# Altium PCB JacdacSingleRgbLed 42.PcbDoc
Units mm, origin at the board's own origin, x right, y up, seen from the top; angles counter-clockwise.
Board outline 13.98 x 25.7 mm, 2 copper layers (Top Layer, Bottom Layer), stack 1.525 mm thick; 26 components, 10 nets, 77 pads, 11 vias.
Unrouted connection lines stored in the file: 16.
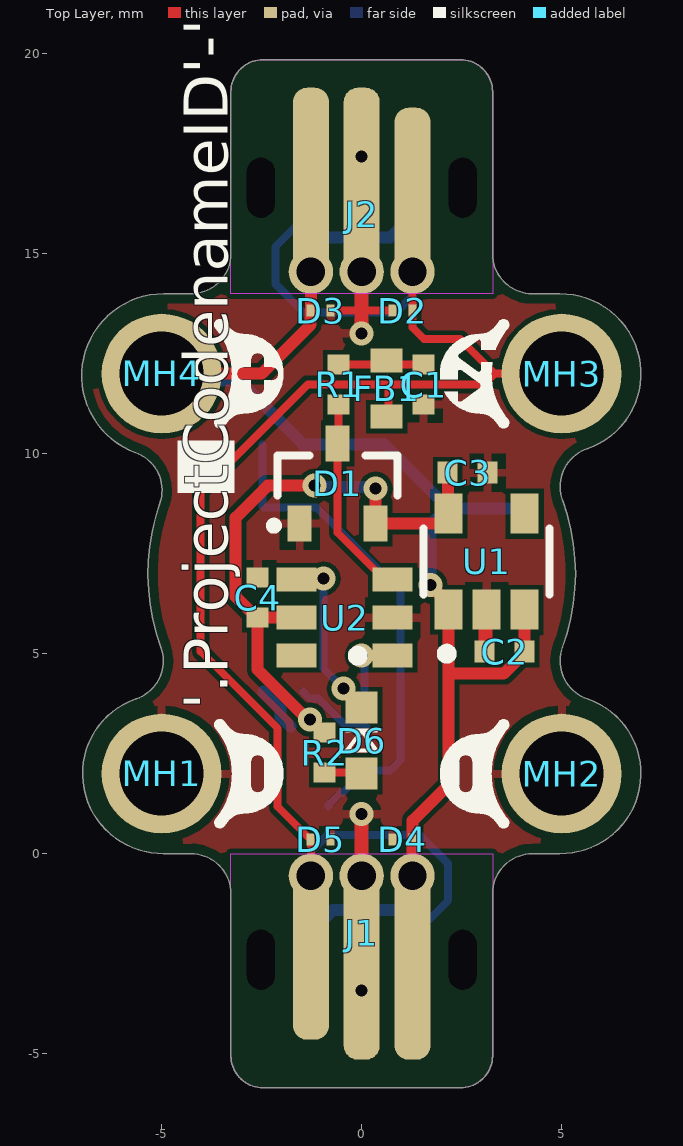
[diagram p0: Top Layer view]
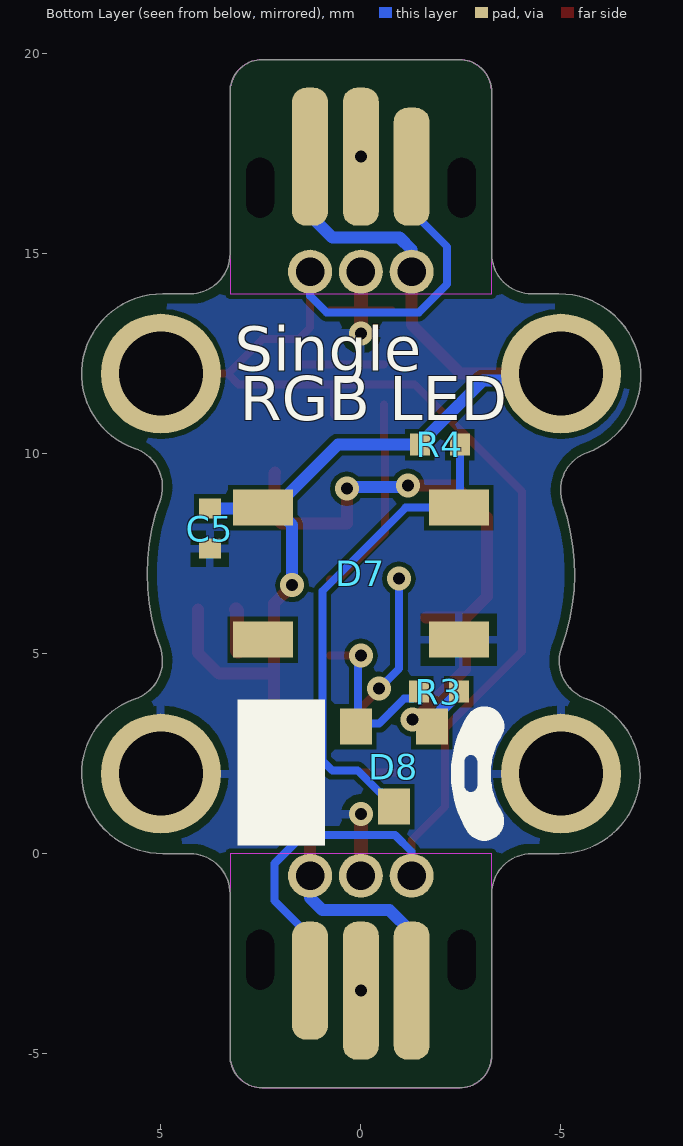
[diagram p1: Bottom Layer view, seen from below]

## Layer stack, top to bottom
Top Solder: solder mask 0.0102, Solder Resist, Dk 3.5
Top Layer: signal copper 0.0356
Dielectric 1: core 1.454, FR-4, Dk 4.2
Bottom Layer: signal copper 0.0356
Bottom Solder: solder mask 0.0102, Solder Resist, Dk 3.5

## Board outline
-4.95,0 -4.27,0 cw(c-4.27,-1) -3.27,-1 -3.27,-5.05 ccw(c-2.471,-5.051) -2.47,-5.85 2.47,-5.85 ccw(c2.471,-5.051) 3.27,-5.05 3.27,-1 cw(c4.27,-1) 4.27,0 4.95,0 ccw(c4.951,2.049) 6.4,0.6 ccw(c5,2) 5.637,3.875 cw(c5.959,4.821) 5.02,5.165 ccw(c0,7) 5.02,8.835 cw(c5.959,9.178) 5.637,10.125 ccw(c5,12) 6.586,13.186 ccw(c4.951,11.951) 4.95,14 4.27,14 cw(c4.27,15) 3.27,15 3.27,19.05 ccw(c2.471,19.051) 2.47,19.85 -2.47,19.85 ccw(c-2.471,19.051) -3.27,19.05 -3.27,15 cw(c-4.27,15) -4.27,14 -4.95,14 ccw(c-4.951,11.951) -5.651,10.026 cw(c-5.992,9.086) -5.047,8.757 ccw(c0,7) -5.02,5.165 cw(c-5.959,4.821) -5.637,3.875 ccw(c-5,2) -6.4,0.6 ccw(c-4.951,2.049)

## Design rules (kind name [scope] priority, off if disabled: settings)
AssemblyTestPointUsage [All] p1: valid=2
BoardOutlineClearance [All] p1: gap=0.3 ignorepadtopadclearanceinfootprint=FALSE except(0: Arc-SplitContinuation Track-SplitContinuation SMDPad-SplitContinuation THPad-SplitContinuation Via-SplitContinuation Fill-SplitContinuation Poly-SplitContinuation Region-OutlineEdge Region-SplitContinuation Text-OutlineEdge Text-SplitContinuation; 0.25: THPad-OutlineEdge Poly-OutlineEdge)
Clearance [All] p1: gap=0.125 ignorepadtopadclearanceinfootprint=FALSE except(0: Arc-Hole Track-Hole SMDPad-Hole THPad-Hole Via-Hole Fill-Hole Poly-Hole Region-Hole Text-Hole; 0.15: Arc-Arc Arc-Track Track-Track)
ComponentClearance SpecialComponentClearance [InComponent('MH1') or InComponent('MH2')  or InComponent('MH3')  or InComponent('MH4') vs InComponent('J3') or InComponent('J4')  or InComponent('J6')  or InComponent('J7') or InComponent('J2') or InComponent('MH2') or InComponent('J1')] p1: gap=0 collisioncheckmode=3 verticalgap=0 showdistances=FALSE
ComponentClearance [All] p2: gap=0.2 collisioncheckmode=3 verticalgap=0.2 showdistances=FALSE
DiffPairsRouting [All] p1: maxlimit=2 minlimit=0.15 mostfreqgap=0.15 toplayer_minwidth=0.15 toplayer_maxwidth=2 toplayer_prefwidth=0.15 bottomlayer_minwidth=0.15 bottomlayer_maxwidth=2 bottomlayer_prefwidth=0.15 substack1={CB9D278B-8BF5-444A-AAF4-837A2A9DF42D} toplayer_{cb9d278b-8bf5-444a-aaf4-837a2a9df42d}_minwidth=0.381 toplayer_{cb9d278b-8bf5-444a-aaf4-837a2a9df42d}_maxwidth=0.381 toplayer_{cb9d278b-8bf5-444a-aaf4-837a2a9df42d}_prefwidth=0.381 bottomlayer_{cb9d278b-8bf5-444a-aaf4-837a2a9df42d}_minwidth=0.381 bottomlayer_{cb9d278b-8bf5-444a-aaf4-837a2a9df42d}_maxwidth=0.381 bottomlayer_{cb9d278b-8bf5-444a-aaf4-837a2a9df42d}_prefwidth=0.381 substack2={826B8647-A721-4255-895A-19F9591B9CD1} toplayer_{826b8647-a721-4255-895a-19f9591b9cd1}_minwidth=0.381 toplayer_{826b8647-a721-4255-895a-19f9591b9cd1}_maxwidth=0.381 toplayer_{826b8647-a721-4255-895a-19f9591b9cd1}_prefwidth=0.381 bottomlayer_{826b8647-a721-4255-895a-19f9591b9cd1}_minwidth=0.381 bottomlayer_{826b8647-a721-4255-895a-19f9591b9cd1}_maxwidth=0.381 bottomlayer_{826b8647-a721-4255-895a-19f9591b9cd1}_prefwidth=0.381 substack3={E64FCAF4-1BC8-437D-B1E0-0E5F2DC0F59E} toplayer_{e64fcaf4-1bc8-437d-b1e0-0e5f2dc0f59e}_minwidth=0.381 toplayer_{e64fcaf4-1bc8-437d-b1e0-0e5f2dc0f59e}_maxwidth=0.381 toplayer_{e64fcaf4-1bc8-437d-b1e0-0e5f2dc0f59e}_prefwidth=0.381 bottomlayer_{e64fcaf4-1bc8-437d-b1e0-0e5f2dc0f59e}_minwidth=0.381 bottomlayer_{e64fcaf4-1bc8-437d-b1e0-0e5f2dc0f59e}_maxwidth=0.381 bottomlayer_{e64fcaf4-1bc8-437d-b1e0-0e5f2dc0f59e}_prefwidth=0.381 substack4={E61CE66C-507C-4E1E-8E83-C905434AFC1C} toplayer_{e61ce66c-507c-4e1e-8e83-c905434afc1c}_minwidth=0.381 toplayer_{e61ce66c-507c-4e1e-8e83-c905434afc1c}_maxwidth=0.381 toplayer_{e61ce66c-507c-4e1e-8e83-c905434afc1c}_prefwidth=0.381 bottomlayer_{e61ce66c-507c-4e1e-8e83-c905434afc1c}_minwidth=0.381 bottomlayer_{e61ce66c-507c-4e1e-8e83-c905434afc1c}_maxwidth=0.381 bottomlayer_{e61ce66c-507c-4e1e-8e83-c905434afc1c}_prefwidth=0.381 maxuncoupledlength=25
FabricationTestPointUsage [All] p1: valid=2 allowmultiple=FALSE
HoleSize [All] p1: absolutevalues=TRUE maxlimit=2.54 minlimit=0.2 maxpercent=80.000 minpercent=20.000
MinimumSolderMaskSliver [All] p1: minsoldermaskwidth=0.005
PlaneClearance [All] p1: clearance=0.3
PlaneConnect [All] p1: planeconnectstyle=Relief reliefexpansion=0.5 reliefentries=4 reliefconductorwidth=0.2 reliefairgap=0.3
PolygonConnect "PolygonConnect GND" [isVIA] p1: connectstyle=Relief reliefconductorwidth=0.2 reliefentries=4 polygonreliefangle="90 Angle" airgapwidth=0.2
PolygonConnect [All] p2: connectstyle=Relief reliefconductorwidth=0.2 reliefentries=4 polygonreliefangle="90 Angle" airgapwidth=0.2
RoutingVias [All] p1: holewidth=0.3 width=0.6 viastyle="Through Hole" minholewidth=0.3 minwidth=0.6 maxholewidth=0.3 maxwidth=0.8
SilkToSilkClearance [All] p1: silktosilkclearance=0.001
SilkToSolderMaskClearance [IsPad] p1: minsilkscreentomaskgap=0.05 clearancetoexposedcopper=TRUE
SolderMaskExpansion [All] p1: expansion=0.075 istentingtop=FALSE
Width [All] p1: maxlimit=2 minlimit=0.15 preferedwidth=0.15 substack1={CB9D278B-8BF5-444A-AAF4-837A2A9DF42D} substack2={826B8647-A721-4255-895A-19F9591B9CD1} substack3={E64FCAF4-1BC8-437D-B1E0-0E5F2DC0F59E} substack4={E61CE66C-507C-4E1E-8E83-C905434AFC1C} minimp=50.000000 maximp=50.000000 favimp=50.000000
20 further rules are at their usual default settings.

## Components (designator, comment, footprint, x,y, rotation, side; value= is the part's Value field where it differs from the comment)
C1 "CL05C330JB51PNC" "C0402_0.55MM - without outline" 1.55,11.725 r90 top
C2 "CL05A105KP5NNNC" "C0402_0.55MM - without outline" 3.575,5.05 r0 top
C3 "CL05A105KP5NNNC" "C0402_0.55MM - without outline" 2.65,9.525 r180 top
C4 "CL05A105KP5NNNC" "C0402_0.55MM - without outline" -2.6,6.4 r270 top
C5 "CL05A105KP5NNNC" "C0402_0.55MM - without outline" 3.775,8.125 r90 bottom
D1 "BAT54S" NXP-BAT54S-TO-236AB -0.6,9.25 r90 top
D2 "VBUS05B1-SD0-G4-08" "0201-VBUS05B1-SD0-G4-08 - Without outline" 1.025,13.575 r180 top
D3 "VBUS05B1-SD0-G4-08" "0201-VBUS05B1-SD0-G4-08 - Without outline" -1.025,13.575 r0 top
D4 "VBUS05B1-SD0-G4-08" "0201-VBUS05B1-SD0-G4-08 - Without outline" 1.025,0.35 r180 top
D5 "VBUS05B1-SD0-G4-08" "0201-VBUS05B1-SD0-G4-08 - Without outline" -1.025,0.35 r0 top
D6 "SML-D12D" "Rohm SML-D12 Orange - without outline" 0,2.825 r270 top
D7 "SK6812" "SK6812 - without outline" 0,7 r0 bottom
D8 "2N7002K" SOT-23 -0.825,2.175 r270 bottom
FB1 "TDK MPZ1608S102ATA00" "TDK MPZ1608 0.8mm - without outline" 0.625,11.625 r90 top
J1 "3 pin JACDAC edge connector" JACDAC_EDGE_CONNECTOR_0.15mm_T&G 0,-0.55 r180 top
J2 "3 pin JACDAC edge connector" JACDAC_EDGE_CONNECTOR_0.15mm_T&G 0,14.55 r0 top
MH1 "MH_5.0MMK_3.0MMC_2.1MMD_PTH" MH_5.0MMK_3.0MMC_2.1MMD_PTH -5,2 r180 top
MH2 "MH_5.0MMK_3.0MMC_2.1MMD_PTH" MH_5.0MMK_3.0MMC_2.1MMD_PTH 5,2 r0 top
MH3 "MH_5.0MMK_3.0MMC_2.1MMD_PTH" MH_5.0MMK_3.0MMC_2.1MMD_PTH 5,12 r180 top
MH4 "MH_5.0MMK_3.0MMC_2.1MMD_PTH" MH_5.0MMK_3.0MMC_2.1MMD_PTH -5,12 r0 top
R1 "RC0402FR-07220RL" "R0402 - Without outline" -0.575,11.725 r90 top
R2 "RC0402FR-071KL" "R0402 - Without outline" -0.925,2.525 r90 top
R3 "10k" "R0402 - Without outline" -1.95,4.05 r0 bottom
R4 "10k" "R0402 - Without outline" -1.975,10.225 r180 bottom
U1 "LDO 3.3V/300 mA" ON_SEMI-SOT23-5 3.125,7.3 r90 top
U2 "PMS150C" SOT23-6 -0.425,5.9 r180 top

## Footprints (in the part's own frame and the unit in brackets; to place one, negate y for a bottom-side part, rotate by r counter-clockwise, add the part's x,y. Pads: shape width x height; smd on the part's side, far side on the other; paste and mask are expansions set on the pad)
"0201-VBUS05B1-SD0-G4-08 - Without outline" [mm]
  rect 0.2x0.3 smd mask+0.05: 1(-0.25,0) 2(0.25,0)
  body extent -0.3,-0.15 0.3,0.15, height 0.22
"C0402_0.55MM - without outline" [mm]
  rect 0.5x0.55 smd: 1(-0.5,0) 2(0.5,0)
  body extent -0.5,-0.25 0.5,0.25, height 0.55
JACDAC_EDGE_CONNECTOR_0.15mm_T&G [mm] "JacDac 3 pin connector with traces for 0.15mm T&G"
  rrect78% 0.9x2.95 smd far side paste-1 mask+0: 1(-1.27,2.625)
  rrect78% 0.9x4.3 smd paste-1 mask+0: 1(1.27,1.95)
  round 1.11 / inner round 0.71 / far side round 1.1 hole 0.71 paste-0.254 mask+0: 1(1.27,0) 2(0,0) 3(-1.27,0)
  rrect78% 0.9x3.45 smd far side paste-1 mask+0: 2(0,2.875) 3(1.27,2.875)
  rrect78% 0.9x4.8 smd paste-1 mask+0: 2(0,2.2) 3(-1.27,2.2)
  round 0 hole 0.7 slot 1.5 at 90 deg unplated: ""(-2.52,2.1) ""(2.52,2.1)
  Top Layer keep-out region: -3.27,-0.55 -3.27,4.5 -3.209,4.806 -3.036,5.066 -2.776,5.239 -2.47,5.3 -2.47,5.3 2.47,5.3 2.776,5.239 3.036,5.066 3.209,4.806 3.27,4.5 3.27,4.5 3.27,-0.55
  Bottom Layer lines w0.2: 1.27,0 1.27,-0.6 0.854,-1.016 0.254,-1.016 -1.448,-1.016 -2.159,-0.305 -2.159,0.624 -1.27,1.513 -1.27,2.625
  Bottom Layer lines w0.3: 1.27,2.875 1.27,1.412 0.713,0.855 -0.965,0.855 -1.27,0.55 -1.27,0
  Bottom Layer keep-out region: -3.27,-0.55 -3.27,4.5 -3.209,4.806 -3.036,5.066 -2.776,5.239 -2.47,5.3 -2.47,5.3 2.47,5.3 2.776,5.239 3.036,5.066 3.209,4.806 3.27,4.5 3.27,4.5 3.27,-0.55
MH_5.0MMK_3.0MMC_2.1MMD_PTH [mm] "Mounting Hole 5.0mm clearance, 3.1 annualar ring and 2.1mm PTH"
  round 3 hole 2.1 mask+0.05: 1(0,0)
NXP-BAT54S-TO-236AB [mm] "SOT23, 3-Leads, Body 2.90x2.30mm, Pitch 0.95mm, IPC Medium Density"
  rect 0.9x0.6 smd: 1(-1,0.95) 2(-1,-0.95) 3(1,0)
  silkscreen extent -1.15,-1.5 0.7,1.69, body extent -1.32,-1.5 1.32,1.5, height 1.12
ON_SEMI-SOT23-5 [mm]
  rect 1x0.7 smd: 1(-1.2,0.95) 2(-1.2,0) 3(-1.2,-0.95) 4(1.2,-0.95) 5(1.2,0.95)
  silkscreen extent -2.42,-1.58 0.82,1.58, body extent -1.5,-1.57 1.5,1.58, height 1.1
"R0402 - Without outline" [mm]
  rect 0.5x0.55 smd: 1(-0.5,0) 2(0.5,0)
  body extent -0.5,-0.25 0.5,0.25, height 0.35
"Rohm SML-D12 Orange - without outline" [mm]
  rect 0.8x0.8 smd paste-0.05: 1(-0.825,0) 2(0.825,0)
  silkscreen extent -0.25,-0.38 0.25,0.38, body extent -0.8,-0.4 0.8,0.4, height 0.54
"SK6812 - without outline" [mm]
  rect 1.5x0.9 smd: 1(-2.45,1.65) 2(-2.45,-1.65) 3(2.45,-1.65) 4(2.45,1.65)
  body extent -2.67,-2.47 2.68,2.48, height 1.5
SOT23-6 [mm] "SOT23, 6-Leads, Body 2.90x2.45mm, Pitch 0.95mm, IPC Medium Density"
  rect 1x0.6 smd: 1(-1.2,0.95) 2(-1.2,0) 3(-1.2,-0.95) 4(1.2,-0.95) 5(1.2,0) 6(1.2,0.95)
  silkscreen extent -0.43,0.85 -0.23,1.05, body extent -1.4,-1.45 1.4,1.45, height 1.45
SOT-23 [mm] "SOT23, 3-Leads, Body 2.90x2.45mm, Pitch 0.95mm, IPC Medium Density"
  rect 0.9x0.8 smd: 1(-1,0.95) 2(-1,-0.95) 3(1,0)
  body extent -1.27,-1.5 1.23,1.5, height 1.1
"TDK MPZ1608 0.8mm - without outline" [mm]
  rect 0.6x0.8 smd paste-0.1: 1(-0.7,0) 2(0.7,0)
  body extent -0.8,-0.4 0.8,0.4, height 0.8

## Part data
C1: "CAP CER 33PF 50V NP0 0402", Capacitance=33pF, Case Code (Imperial)=0402, Case Code (Metric)=1005, Manufacturer=Samsung, Max Operating Temperature=125°C, Min Operating Temperature=-55°C, Ratings=AEC-Q200, Supplier Part Number 1=1276-6515-1-ND, Tolerance=5%, Voltage Rating=50V, Case/Package=0402, Category=Capacitors, Checked=?, ComponentLink1Description="Samsung datasheet online", ComponentLink1URL=http://www.samsungsem.com/kr/support/library/product-catalog/mlcc.jsp, Created=DG, Lead Free="Lead Free", Length=0.039inch, Manufacturer Part Number=CL05C330JB51PNC, Mount="Surface Mount", Packaging="Tape and Reel", Pricing 1="1=0.10000, 10=0.07500, 50=0.04060, 100=0.03320, 500=0.02374, 1000=0.01865, 2500=0.01696, 5000=0.01560 (USD)", Pricing 2="1=0.11000, 10=0.08200, 100=0.03600, 500=0.02600, 1000=0.02000, 2500=0.01800 (USD)", Pricing 3="10000=0.00780 (USD)", RoHS=Yes, Stock 1=250654, Stock 2=97900, Stock 3=100000, Supplier 1=Digi-Key, Supplier 2=Mouser, Supplier 3="Future Electronics", Supplier Part Number 2=187-CL05C330JB51PNC, Supplier Part Number 3=6022520, Thickness=0.022inch, Width=0.02inch
C2 C3 C4 C5: "CAP CER 1UF 10V X5R 0402", Capacitance=1µF, Case Code (Imperial)=0402, Case Code (Metric)=1005, Dielectric=X5R, Manufacturer=Samsung, Max Operating Temperature=85°C, Min Operating Temperature=-55°C, Package Quantity=1, Supplier Part Number 1=1276-1076-1-ND, Tolerance=10%, Voltage Rating=10V, Case/Package=0402, Category=Capacitors, Checked=?, ComponentLink1Description="Online datasheet", ComponentLink1URL=https://datasheet.ciiva.com/15195/getdatasheetpartid-358390-15195630.pdf, Contact Plating=Tin, Created=DG, Depth=0.5mm, Height=0.5mm, Length=1mm, Manufacturer Part Number=CL05A105KP5NNNC, Material=Ceramic, Mount="Surface Mount", Packaging="Tape and Reel", Pricing 1="1=0.10000, 10=0.03900, 50=0.02100, 100=0.01720, 500=0.01228, 1000=0.00965, 2500=0.00877, 5000=0.00807 (USD)", Pricing 2="1=0.10000, 10=0.04200, 100=0.01800, 500=0.01300, 1000=0.01000, 2500=0.00900 (USD)", Pricing 3="10=0.02450, 100=0.02000, 500=0.01310, 2500=0.00920, 5000=0.00810, 10000=0.00640, 50000=0.00490 (GBP)", Radiation Hardening=No, RoHS=Yes, Stock 1=5705569, Stock 2=928941, Stock 3=53670, Supplier 1=Digi-Key, Supplier 2=Mouser, Supplier 3=Farnell, Supplier Part Number 2=187-CL05A105KP5NNNC, Supplier Part Number 3=3013329, Thickness=0.022inch, Width=0.02inch
D1: "DIODE ARRAY SCHOTTKY 30V SOT23", Manufacturer=Nexperia, Manufacturer Part Number=BAT54S,235, Supplier Part Number 1=1727-1868-1-ND, Category="Rectifier Diodes", ComponentLink1Description="NXP datasheet online", ComponentLink1URL=https://assets.nexperia.com/documents/data-sheet/BAT54_SER.pdf, Pricing 1="1=0.13000, 10=0.11900, 100=0.05610, 500=0.03326, 1000=0.02185, 5000=0.02138 (USD)", RoHS=No, Stock 1=14011, Supplier 1=Digi-Key, Supplier 2=Mouser, Supplier 3=RSComponents, Supplier Part Number 2=771-BAT54S235, Supplier Part Number 3=1707990
D2 D3 D4 D5: "TVS DIODE 5.5V 18V CLP0603", Capacitance=0.4pF, Case Code (Imperial)=0201, Case Code (Metric)=0603, Clamping Voltage=18V, Manufacturer="Vishay Semiconductors", Max Operating Temperature=150°C, Min Breakdown Voltage=6V, Min Operating Temperature=-55°C, Peak Pulse Current=2.5A, Peak Pulse Power=45W, Power Line Protection=No, Resistor Type=Zener, Reverse Standoff Voltage=5.5V, Supplier Part Number 1=VBUS05B1-SD0-G4-08GICT-ND, Case/Package=0201, Category="TVS Diodes", Checked By=?, ComponentLink2Description="Online datasheet", ComponentLink2URL=http://www.vishay.com/docs/85899/vbus05b1-sd0.pdf, Created By="D. Gakure", Direction=Bidirectional, Element Configuration=Single, Manufacturer Part Number=VBUS05B1-SD0-G4-08, Mount="Surface Mount", Number of Bidirectional Channels=1, Number of Pins=2, Packaging="Tape and Reel", Pricing 1="1=0.27000, 10=0.18500, 100=0.09020, 500=0.07524, 1000=0.05228, 2000=0.04531, 5000=0.04203 (USD)", Pricing 2="5=0.20800, 10=0.14000, 100=0.06340, 500=0.05020, 1000=0.04160, 5000=0.03300 (GBP)", Pricing 3="1=0.27000, 10=0.18500, 50=0.18500, 100=0.09300, 1000=0.03900, 10000=0.03400 (USD)", Pricing 4="1=0.17630, 10=0.14370, 25=0.14230, 100=0.07810, 250=0.07660, 500=0.06310, 15000=0.02980, 150000=0.02970, 1500000=0.02870, 7500000=0.02800 (USD)", RoHS=Yes, Stock 1=22028, Stock 2=13100, Stock 3=1209, Stock 4=719, Supplier 1=Digi-Key, Supplier 2=Farnell, Supplier 3=Mouser, Supplier 4="Arrow Electronics", Supplier Part Number 2=2932858, Supplier Part Number 3=78-VBUS05B1SD0-G4-08, Supplier Part Number 4=VBUS05B1-SD0-G4-08, Working Voltage=5.5V
D6: "1.6 x 0.8 x 0.55mm (0603) LED 605nm Orange", Colour=Orange, Current - Test=20mA, Luminous Flux @ Current - Test=-, Manufacturer="Rohm Semiconductor", Manufacturer Part Number=SML-D12D8WT86, Millicandela Rating=100mcd, Package / Case="0603 (1608 Metric)", Supplier Part Number 1=511-1577-1-ND, Voltage - Forward (Vf) (Typ)=2.2V, Category=Optoelectronics, ComponentLink1Description=http://rohmfs.rohm.com/en/products/databook/datasheet/opto/led/chip_mono/sml-d1.pdf, ComponentLink1URL=http://rohmfs.rohm.com/en/products/databook/datasheet/opto/led/chip_mono/sml-d1.pdf, Height=0.55mm, Lens Style/Size="Rectangle with Flat Top, 1.2mm x 0.8mm", Lens Type="Diffused, White", Mounting Type="Surface Mount", Packaging="Cut Tape (CT)", Pricing 1="1=0.38, 10=0.279, 25=0.2232, 100=0.1478, 250=0.1046, 500=0.08926, 1000=0.06974 (GBP)", RoHS="RoHS Compliant", Size / Dimension="1.60mm L x 0.80mm W", Stock 1=1719, Supplier 1=Digi-Key, Viewing Angle=-, Wavelength - Dominant=605nm, Wavelength - Peak=-
D7: "WS2812B 5050 RGB LED WITH INTEGRATED DRIVER", Color=Blue,Green,Red, Manufacturer="Shenzhen LED Color", Supplier Part Number 1=1528-1104-ND, Category=LEDs, ComponentLink1Description="Online datasheet", ComponentLink1URL=http://www.mouser.com/ds/2/737/SK6812_LED_datasheet_-953546.pdf, Length=5mm, Manufacturer Part Number=SK6812, Mount="Surface Mount", Number of LEDs=10, Pricing 1="1=4.50000 (USD)", RoHS=Yes, Stock 1=107, Supplier 1=Digi-Key, Supplier 2=Mouser, Supplier 3="Adafruit Industries", Supplier Part Number 2=485-1655, Supplier Part Number 3=1655, Width=5mm
D8: library part "2N7002K (2)", "MOSFET Transistor, N Channel, 300 mA, 60 V, 2 ohm, 10 V, 2.5 V", Case/Package=SOT-23, Continuous Drain Current (ID)=300mA, Drain to Source Breakdown Voltage=60V, Drain to Source Resistance=2R, Gate to Source Voltage (Vgs)=20V, Input Capacitance=50pF, Manufacturer="ON Semiconductor / Fairchild", Max Operating Temperature=150°C, Max Power Dissipation=350mW, Min Operating Temperature=-55°C, Package Quantity=1, Supplier Part Number 1=2N7002KCT-ND, Threshold Voltage=2.5V, Category=MOSFETs, Checked By=?, ComponentLink1Description="Online datasheet", ComponentLink1URL=https://www.onsemi.com/pdf/datasheet/2n7002k-d.pdf, Contact Plating=Tin,Matte, Created By="D. Gakure", Drain to Source Voltage (Vdss)=60V, Drain-source On Resistance-Max=2R, Element Configuration=Single, Height=1.2mm, Lead Free="Lead Free", Length=2.92mm, Manufacturer Part Number=2N7002K, Mount="Surface Mount", Number of Elements=1, Number of Pins=3, On-State Resistance=2R, Packaging="Tape and Reel", Polarity=N-CHANNEL, Power Dissipation=350mW, Pricing 1="1=0.40000, 10=0.32500, 25=0.27240, 100=0.17240, 500=0.11344, 1000=0.07714 (USD)", Pricing 2="1=0.40000, 10=0.27300, 50=0.27300, 100=0.13400, 1000=0.07800, 10000=0.05100 (USD)", Pricing 3="5=0.34800, 10=0.23500, 100=0.09100, 500=0.05850, 3000=0.04630, 9000=0.03860, 24000=0.03750, 45000=0.03530 (GBP)", Radiation Hardening=No, Rds On Max=2R, REACH SVHC="No SVHC", RoHS=Yes, Stock 1=53564, Stock 2=111825, Stock 3=101059, Supplier 1=Digi-Key, Supplier 2=Mouser, Supplier 3=Farnell, Supplier Part Number 2=512-2N7002K, Supplier Part Number 3=2453382, Turn-Off Delay Time=30ns, Turn-On Delay Time=5ns, Voltage=60V, Width=1.3mm
FB1: "0603 1k@100MHz 0.8A chip", Case Code (Imperial)=0603, Case Code (Metric)=1608, Current Rating=800mA, DC Resistance (DCR)=300mR, Manufacturer=TDK, Manufacturer Part Number=MPZ1608S102ATA00, Package Quantity=4000, Supplier Part Number 1=445-8694-1-ND, Tolerance=25%, Case/Package=0603, ComponentLink2Description="datasheet online", ComponentLink2URL=https://www.mouser.co.uk/datasheet/2/400/eads_commercial_power_mpz1608_en-923650.pdf, ComponentLink3Description=datasheet, ComponentLink3URL="Y:\System\Altium\Libraries 2014\TDK\Datasheets\eads_commercial_power_mpz1608_en-923650.pdf", Core Material=Ferrite, Height=0.037inch, Impedance="1kR @ 100MHz", Length=0.063inch, Max DC Current=800mA, Mount="Surface Mount", Packaging="Tape and Reel", Pricing 1="1=0.1, 10=0.079, 25=0.0716, 50=0.0644, 100=0.0472, 250=0.03432, 500=0.03146, 1000=0.02717 (USD)", Stock 1=113542, Supplier 1=Digi-Key, Supplier 2=Mouser, Supplier Part Number 2=810-MPZ1608S102ATA00, Width=0.031inch
J1 J2: library part "JACDAC edge connector", "3 pin JACDAC edge connector 1.27mm pitch", Manufacturer Part Number=JACDAC_EDGE_CONNECTOR, Checked By=?, ComponentLink1Description="Yuliang JACDAC cable connector drawing online", ComponentLink1URL=https://github.com/microsoft/jacdac-mdk/blob/main/connector/JACDAC-Connector-by-Yuliang-2020-11-28.pdf, ComponentLink2Description="JACDAC PCB edge connector spec onlin", ComponentLink2URL=https://github.com/microsoft/jacdac-mdk/blob/main/connector/JACDAC_PCB_Edge_Connector_Drawing_JD-PEC-01_rev_01.pdf, Created By="D. Gakure", PCB Type="1.6mm FR4"
MH1 MH2 MH3 MH4: "Mounting Hole 5.0mm keepout, 3.0mm annualar ring and 2.1mm Drill PTH"
R1: "RES SMD 220 OHM 1% 1/16W 0402", Case Code (Imperial)=0402, Case Code (Metric)=1005, Manufacturer=Yageo, Max Operating Temperature=155°C, Max Power Dissipation=63mW, Min Operating Temperature=-55°C, Package Quantity=1, Power Rating=62.5mW, Resistance=220R, Resistor Type="Thick Film", Supplier Part Number 1=311-220LRCT-ND, Temperature Coefficient=100ppm/°C, Tolerance=1%, Voltage Rating=50V, Case/Package=0402, Category=Resistors, Checked=?, ComponentLink1Description="Online datasheet", ComponentLink1URL=https://datasheet.ciiva.com/11819/0900766b80c66297-11819466.pdf, Created=D.G, Depth=0.5mm, Features="Moisture Resistant", Height=0.016inch, Lead Free="Lead Free", Length=1mm, Manufacturer Part Number=RC0402FR-07220RL, Military Standard=Not, Number of Pins=2, Number of Terminations=2, Packaging="Tape and Reel", Pricing 1="1=0.10000, 10=0.01400, 100=0.00580, 1000=0.00262, 2500=0.00228, 5000=0.00188 (USD)", Pricing 2="1=0.10000, 10=0.01200, 100=0.00400, 1000=0.00400, 2500=0.00400, 10000=0.00300 (USD)", Pricing 3="1=0.08130, 25=0.01210, 100=0.01120, 250=0.01030, 500=0.00900 (GBP)", REACH SVHC="No SVHC", RoHS=Yes, Stock 1=1286042, Stock 2=324625, Stock 3=18234, Supplier 1=Digi-Key, Supplier 2=Mouser, Supplier 3=Farnell, Supplier Part Number 2=603-RC0402FR-07220RL, Supplier Part Number 3=2147864, Termination=SMD/SMT, Voltage Rating (DC)=50V, Width=0.02inch
R2: "RES SMD 1K OHM 1% 1/16W 0402", Case Code (Imperial)=0402, Case Code (Metric)=1005, Manufacturer=Yageo, Max Operating Temperature=155°C, Min Operating Temperature=-55°C, Power Rating=62.5mW, Resistance=1kR, Resistor Type="Thick Film", Supplier Part Number 1=311-1.00KLRDKR-ND, Temperature Coefficient=100ppm/°C, Tolerance=1%, Voltage Rating=50V, Case/Package=0402, Category=Resistors, Checked=?, ComponentLink2Description="Online datasheet", ComponentLink2URL=https://datasheet.ciiva.com/12666/pyu-rc0402-51-rohs-l-6-r-12666741.pdf, Created=D.G, Depth=0.5mm, Height=0.32mm, Lead Free="Lead Free", Length=1mm, Manufacturer Part Number=RC0402FR-071KL, Military Standard=Not, Number of Pins=2, Packaging="Tape and Reel", Pricing 1="1=0.10000, 10=0.01400, 100=0.00580, 1000=0.00262, 2500=0.00228, 5000=0.00188 (USD)", Pricing 2="1=0.10000, 10=0.01200, 100=0.00400, 1000=0.00400, 2500=0.00400, 10000=0.00300 (USD)", Pricing 3="1=0.08130, 25=0.01210, 100=0.01120, 250=0.01030, 500=0.00900 (GBP)", REACH SVHC=Unknown, RoHS=Yes, Stock 1=37591306, Stock 2=11912978, Stock 3=29900, Supplier 1=Digi-Key, Supplier 2=Mouser, Supplier 3=Farnell, Supplier Part Number 2=603-RC0402FR-071KL, Supplier Part Number 3=2132441, Termination=SMD/SMT, Voltage Rating (DC)=50V, Width=0.5mm
R3 R4: library part RC0402FR-0710KL, "RES SMD 10K OHM 1% 1/16W 0402", Case Code (Imperial)=0402, Case Code (Metric)=1005, Manufacturer=Yageo, Max Operating Temperature=155°C, Min Operating Temperature=-55°C, Power Rating=62.5mW, Resistance=10kR, Resistor Type="Thick Film", Supplier Part Number 1=311-10.0KLRCT-ND, Temperature Coefficient=100ppm/°C, Tolerance=1%, Voltage Rating=50V, Case/Package=0402, Category=Resistors, Checked=?, ComponentLink3Description="Online datasheet", ComponentLink3URL=https://datasheet.ciiva.com/7849/1686128-7849814.pdf, Created=DG, Depth=0.5mm, Height=0.32mm, Lead Free="Lead Free", Lead Pitch=0.2mm, Length=1mm, Manufacturer Part Number=RC0402FR-0710KL, Military Standard=Not, Number of Pins=2, Number of Terminations=2, Packaging="Tape and Reel", Pricing 1="1=0.10000, 10=0.01400, 100=0.00580, 1000=0.00262, 2500=0.00228, 5000=0.00188 (USD)", Pricing 2="1=0.10000, 10=0.01300, 100=0.00400, 1000=0.00300, 2500=0.00300, 10000=0.00200 (USD)", Pricing 3="10000=0.00350 (GBP)", REACH SVHC="No SVHC", RoHS=Yes, Stock 1=40173593, Stock 2=23672167, Stock 3=370000, Supplier 1=Digi-Key, Supplier 2=Mouser, Supplier 3=Farnell, Supplier Part Number 2=603-RC0402FR-0710KL, Supplier Part Number 3=2363463, Termination=SMD/SMT, Voltage Rating (DC)=50V, Width=0.5mm, Working Voltage=50V
U1: library part NCP114ASN330T1G, "ON SEMICONDUCTOR - NCP114ASN330T1G - LDO Voltage Regulator, Fixed, 1.7 V to 5.5 V in, 3.3 V/300 mA out, 150 mV drop, TSOP-5", Case/Package=SOT-23-5, Dropout Voltage=225mV, Manufacturer="ON Semiconductor", Max Input Voltage=5.5V, Max Operating Temperature=85°C, Min Operating Temperature=-40°C, Min Output Voltage=3.3V, Output Current=300mA, Power Supply Rejection Ratio (PSRR)=75dB, Quiescent Current=95uA, Supplier Part Number 1=NCP114ASN330T1GOSCT-ND, Category="Voltage Regulators - Linear", Checked=?, ComponentLink3Description="On Semi datasheet online", ComponentLink3URL=http://www.onsemi.com/pub/Collateral/NCP114-D.PDF, Created=DG, Lead Free="Lead Free", Manufacturer Part Number=NCP114ASN330T1G, Mount="Surface Mount", Number of Regulators=1, Output Configuration=Positive, Output Type=Fixed, Packaging="Cut Tape", Pricing 1="1=0.33000, 10=0.24900, 25=0.21760, 100=0.12440, 250=0.11664, 500=0.09330, 1000=0.07153 (USD)", RoHS=No, Stock 1=32529, Supplier 1=Digi-Key, Supplier 2=RSComponents, Supplier 3=Mouser, Supplier Part Number 2=1263178, Supplier Part Number 3=863-NCP114ASN330T1G
U2: "8bit OTP Type IO Controller", Manufacturer=PADAUK, Manufacturer Part Number=PMS150C-U6, Package=SOT-23-6, Supplier Part Number 1=C168658, ComponentLink1Description="Padauk datasheet online", ComponentLink1URL=http://www.padauk.com.tw/upload/doc/PMS15A,PMS150C%20datasheet%20V108_EN_20200724.pdf, Pricing 1="1=0.6, 10=0.0595, 100=0.0449", Stock 1=0, Supplier 1=LCSC, Supplier Order Qty 1=3000

## Via types
v1: diameter 0.6, hole 0.3, Top Layer to Bottom Layer, tented both sides, 11 vias

## Nets (pads, with @x,y where several pads share a name; then routed paths per layer and width w, separated by ;. In a path a pad name is that pad's centre, name@x,y a point inside that pad or via, vN(x,y) a via of type N, cw(c..) or ccw(c..) an arc to the next point about the centre after c; other vN are vias at no path point)
3V3: C3.2 C4.2 D1.2 D8.1 R2.2 R3.1 U1.5 U2.5 | length 15.7
  Top Layer w0.3: U2.5 C4.2 ; v1(-1.296,3.35) -1.347,3.35 -2.6,4.603 C4.2 ; v1(-1.175,9.2) -2.35,9.2 -3.15,8.4 -3.15,6.425 -2.625,5.9 C4.2 ; v1(0.35,9.125) D1.2 1.975,8.25 2.175,8.45 U1.5 2.163,8.513 2.163,9.513 C3.2
  Bottom Layer w0.3: R3.1 -2.45,4.025 -2.025,3.6 -2.025,3.425 D8.1 ; v1(-1.175,9.2) -1.137,9.162 0.313,9.162 v1(0.35,9.125)
GND: C1.1 C2.1 C3.1 C4.1 C5.1 D1.1 D2.2 D3.2 D4.2 D5.2 D7.1 J1.2 J2.2 MH1.1 MH2.1 U1.2 U2.2 | length 5.7
  Top Layer w0.2: D3.2 -0.011,13.575 0,13.564 0.011,13.575 D2.2
  Top Layer w0.35: J1.2@0,-0.55 v1(0,0.991) ; v1(0,13.009) 0,13.564 J2.2@0,14.55 ; C2.1 3.1,5.075 3.1,6.075 U1.2
  other v1: 0,-3.425 0,17.425
JD_DATA: D2.1 D5.1 FB1.1 J1.1 J2.1 MH3.1 | length 25.7
  Top Layer w0.2: D5.1 -2.1,1.175 -2.1,3.136 -4.025,5.061 -4.025,9.055 -1.347,11.733 0.675,11.733 ; J1.1@-1.27,-0.55 D5.1@-1.27,0.295 ; FB1.1 0.675,10.975 0.675,11.733 ; J2.1@1.27,14.55 1.27,13.63 1.275,13.625 D2.1 1.275,13.15 1.562,12.863 2.462,12.863 3.325,12 ; MH3.1 3.325,12 ; 0.675,11.733 3.057,11.733 3.325,12
JD_DATA_MCU: D1.3 R1.1 U2.3 | length 5.1
  Top Layer w0.2: R1.1 -0.575,10.275 D1.3 -0.6,8.025 0.575,6.85 U2.3
JD_PWR: C2.2 C5.2 D3.1 D4.1 D7.3 J1.3 J2.3 MH4.1 R4.1 U1.1 U1.3 | length 28.9
  Top Layer w0.3: MH4.1 -2.5,12 -1.275,13.225 D3.1 ; D3.1@-1.27,13.564 J2.3@-1.27,14.55 ; J1.3@1.27,-0.55 1.27,0.345 D4.1 1.275,0.825 2.175,1.725 2.175,4.5 ; v1(1.719,6.715) 1.719,6.706 2.175,6.25 U1.1 2.175,4.5 ; U1.3 C2.2 4.075,5.025 3.55,4.5 2.175,4.5
  Bottom Layer w0.3: MH4.1 -4.825,11.825 -3.05,11.825 -1.475,10.25 R4.1 0.575,10.225 D7.3@2.15,8.65 ; v1(1.719,6.715) 1.719,8.219 D7.3@2.15,8.65 ; C5.2 2.475,8.625 D7.3 D7.3@2.15,8.65
JD_STATUS: D6.1 U2.4 | length 3.6
  Top Layer w0.2: v1(-0.45,4.125) -0.45,4.1 D6.1
  Bottom Layer w0.2: v1(-0.95,6.875) -0.95,4.627 v1(-0.45,4.125) v1(-0.45,4.125)
NetC1_2: C1.2 FB1.2 R1.2 | length 2.2
  Top Layer w0.2: R1.2 0.525,12.225 FB1.2 0.725,12.225 C1.2
NetD6_2: D6.2 R2.1 | length 0.9
  Top Layer w0.2: R2.1 -0.025,2.025 D6.2
NetD7_2: D7.2 D8.3 R4.2 | length 12.4
  Bottom Layer w0.2: R4.2 -2.475,8.675 D7.2 -1.121,8.65 0.965,6.564 0.965,2.33 0.713,2.078 0.078,2.078 -0.475,1.525 -0.525,1.525 -0.825,1.225 D8.3
RGB_LED: D8.2 R3.2 U2.1 | length 4.6
  Top Layer w0.2: v1(0,4.95) U2.1
  Bottom Layer w0.2: R3.2 -1.45,4.025 -1.3,3.875 -1.079,3.875 -0.771,3.567 -0.458,3.254 0.046,3.254 D8.2 0.075,3.225 0.075,4.875 v1(0,4.95)
pads on no net: D7.4 J1. J2. U1.4 U2.6

## Polygon pours and split planes (outlines as drawn)
GND on Bottom Layer "GND" (solid, pour order 1): -4.95,0 -4.27,0 cw(c-4.27,-1) -3.27,-1 -3.27,-5.05 ccw(c-2.471,-5.051) -2.47,-5.85 2.47,-5.85 ccw(c2.471,-5.051) 3.27,-5.05 3.27,-1 cw(c4.27,-1) 4.27,0 4.95,0 ccw(c4.951,2.049) 6.4,0.6 ccw(c5,2) 5.637,3.875 cw(c5.959,4.821) 5.02,5.165 ccw(c0,7) 5.02,8.835 cw(c5.959,9.178) 5.637,10.125 ccw(c5,12) 6.586,13.186 ccw(c4.951,11.951) 4.95,14 4.27,14 cw(c4.27,15) 3.27,15 3.27,19.05 ccw(c2.471,19.051) 2.47,19.85 -2.47,19.85 ccw(c-2.471,19.051) -3.27,19.05 -3.27,15 cw(c-4.27,15) -4.27,14 -4.95,14 ccw(c-4.951,11.951) -5.651,10.026 cw(c-5.992,9.086) -5.047,8.757 ccw(c0,7) -5.02,5.165 cw(c-5.959,4.821) -5.637,3.875 ccw(c-5,2) -6.4,0.6 ccw(c-4.951,2.049)
GND on Top Layer "GND" (solid, pour order 0): -4.95,0 -4.27,0 cw(c-4.27,-1) -3.27,-1 -3.27,-5.05 ccw(c-2.471,-5.051) -2.47,-5.85 2.47,-5.85 ccw(c2.471,-5.051) 3.27,-5.05 3.27,-1 cw(c4.27,-1) 4.27,0 4.95,0 ccw(c4.951,2.049) 6.4,0.6 ccw(c5,2) 5.637,3.875 cw(c5.959,4.821) 5.02,5.165 ccw(c0,7) 5.02,8.835 cw(c5.959,9.178) 5.637,10.125 ccw(c5,12) 6.586,13.186 ccw(c4.951,11.951) 4.95,14 4.27,14 cw(c4.27,15) 3.27,15 3.27,19.05 ccw(c2.471,19.051) 2.47,19.85 -2.47,19.85 ccw(c-2.471,19.051) -3.27,19.05 -3.27,15 cw(c-4.27,15) -4.27,14 -4.95,14 ccw(c-4.951,11.951) -5.651,10.026 cw(c-5.992,9.086) -5.047,8.757 ccw(c0,7) -5.02,5.165 cw(c-5.959,4.821) -5.637,3.875 ccw(c-5,2) -6.4,0.6 ccw(c-4.951,2.049)

## Other copper
Top Layer:
  text "Top Layer" at 9.65,38.875 h1.7
Bottom Layer:
  text "Bottom Layer" at 9.652,37.375 h1.7

## Silkscreen, mask and mechanical layers (free items; w line width, h text height)
Top Overlay:
  drawing of 5 lines, arcs and shapes, not listed
  text "Top Overlay" at 9.65,30.575 h1.7
  text "'.ProjectCodenameID'-'.ProjectRevision'" at -3.35,3.6 h1.1 r90
Bottom Overlay:
  drawing of 2 lines, arcs and shapes, not listed
  text "Bottom Overlay" at 9.652,29.075 h1.7
  text "Single" at 3.15,12.075 h1.1
  text "RGB LED" at 3.028,10.835 h1.1
Top Paste:
  text "Top Paste" at 9.65,27.667 h1.7
Bottom Paste:
  text "Bottom Paste" at 9.652,26.189 h1.7
Top Solder:
  text "Top Solder (resist)" at 9.65,24.867 h1.7
Bottom Solder:
  text "Bottom Solder (resist)" at 9.652,23.378 h1.7
Dimension:
  the board outline again, w0.05
Fabrication notes:
  lines w0.1: -4.55,14.375 11.65,14.317 ; -4.27,-0.363 11.525,-0.375 ; -2.478,-3.616 -1.878,-4.216 3.517,-4.216 ; -2.428,17.502 -1.828,18.102 3.567,18.102 ; 1.566,5.905 8.268,5.905 ; 2.792,-3.491 3.517,-4.216 ; 2.842,17.377 3.567,18.102 ; 5.742,-4.216 3.517,-4.216 ; 5.792,18.102 3.567,18.102 ; 8.275,-3.115 8.625,-3.465 ; 8.325,17.001 8.675,17.351 ; 8.625,-0.486 8.625,-3.465 ; 8.675,14.372 8.675,17.351 ; 8.975,-3.115 8.625,-3.465 ; 9.025,17.001 8.675,17.351 ; -2.428,4.5 -2.428,7.325 1.57,7.325 1.57,4.5 -2.428,4.5
  text "Fabrication Notes" at 9.652,36.089 h1.7
  text "non-plated slots x2" at 5.927,17.942 h1.7
  text "no board edge pips/ / rat's teeth/mouse bites  / above this line - make  / sure board edge is clean" at 11.683,11.696 h1.7
  text "place any PCB manufacturer identifiers / in this region on top layer,  / so they will be underneath the SOT23-6" at 8.432,3.83 h1.7
  text "no board edge pips/ / rat's teeth/mouse bites  / below this line - make  / sure board edge is clean" at 11.6,-2.9 h1.7
  text "non-plated slots x2" at 5.777,-4.433 h1.7
Board Outline:
  the board outline again, w0.2
  text "Board Outline" at 9.652,34.789 h1.7
Top Assy:
  the board outline again, w0.05
  text "Top Assy" at 9.65,33.475 h1.7
Bottom Assy:
  the board outline again, w0.05
  text "Bottom Assy" at 9.652,32.075 h1.7

## Dimensions
-5,2 to 5,2 on Dimension
-3.27,-5.05 to 3.27,-5.05 on Dimension
-5,2 to -5,12 on Dimension
-2.47,-5.85 to -2.47,19.85 on Dimension

## Text inside footprints (layer, text, board x,y; h text height)
J1: Mechanical 9 "JACDAC  / cable connector  / body" at 4.821,-10.008 h1.7 r180; Alignment "board outline  / for 'outie'" at -5.14,-0.864 h1.2 r180; Alignment "board outline  / for 'innie'" at -4.53,1.981 h1.2 r180
J2: Mechanical 9 "JACDAC  / cable connector  / body" at -4.821,24.008 h1.7; Fabrication notes "Bevel/chamfer edge of PCB here" at 3.002,21.3 h1.7; Alignment "board outline  / for 'innie'" at 4.53,12.019 h1.2; Alignment "board outline  / for 'outie'" at 5.14,14.864 h1.2
MH2: Assembly Notes "board outline can  / be on 2.0mm   / radius if necessary" at 7.794,-1.556 h0.5; Assembly Notes "5mm dia keepout  / for traces and  / components to  / allow space for  / bushes/standoffs/ / nuts/screw heads" at 7.794,2.889 h0.5